# Altium PCB PCB1.PcbDoc
Units mm, origin at the board's own origin, x right, y up, seen from the top; angles counter-clockwise.
Board outline 48 x 27 mm, 4 copper layers (Top Layer, Internal Plane 1, Internal Plane 2, Bottom Layer); 23 components, 28 nets, 124 pads, 31 vias.
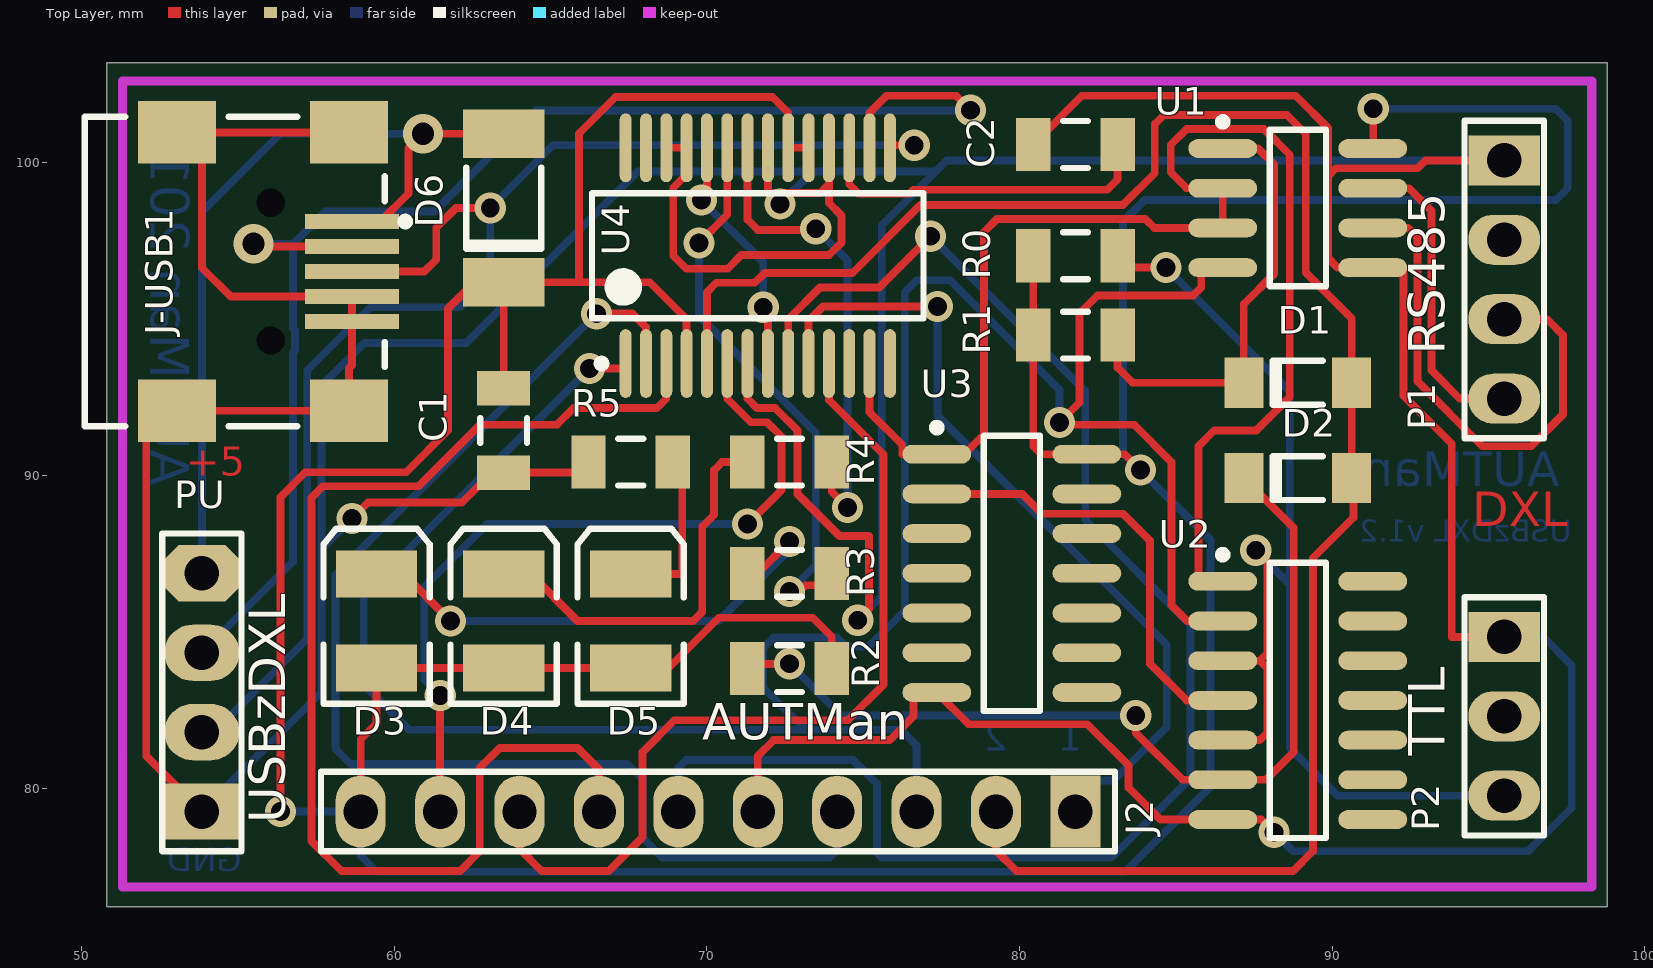
[diagram p0: Top Layer view]
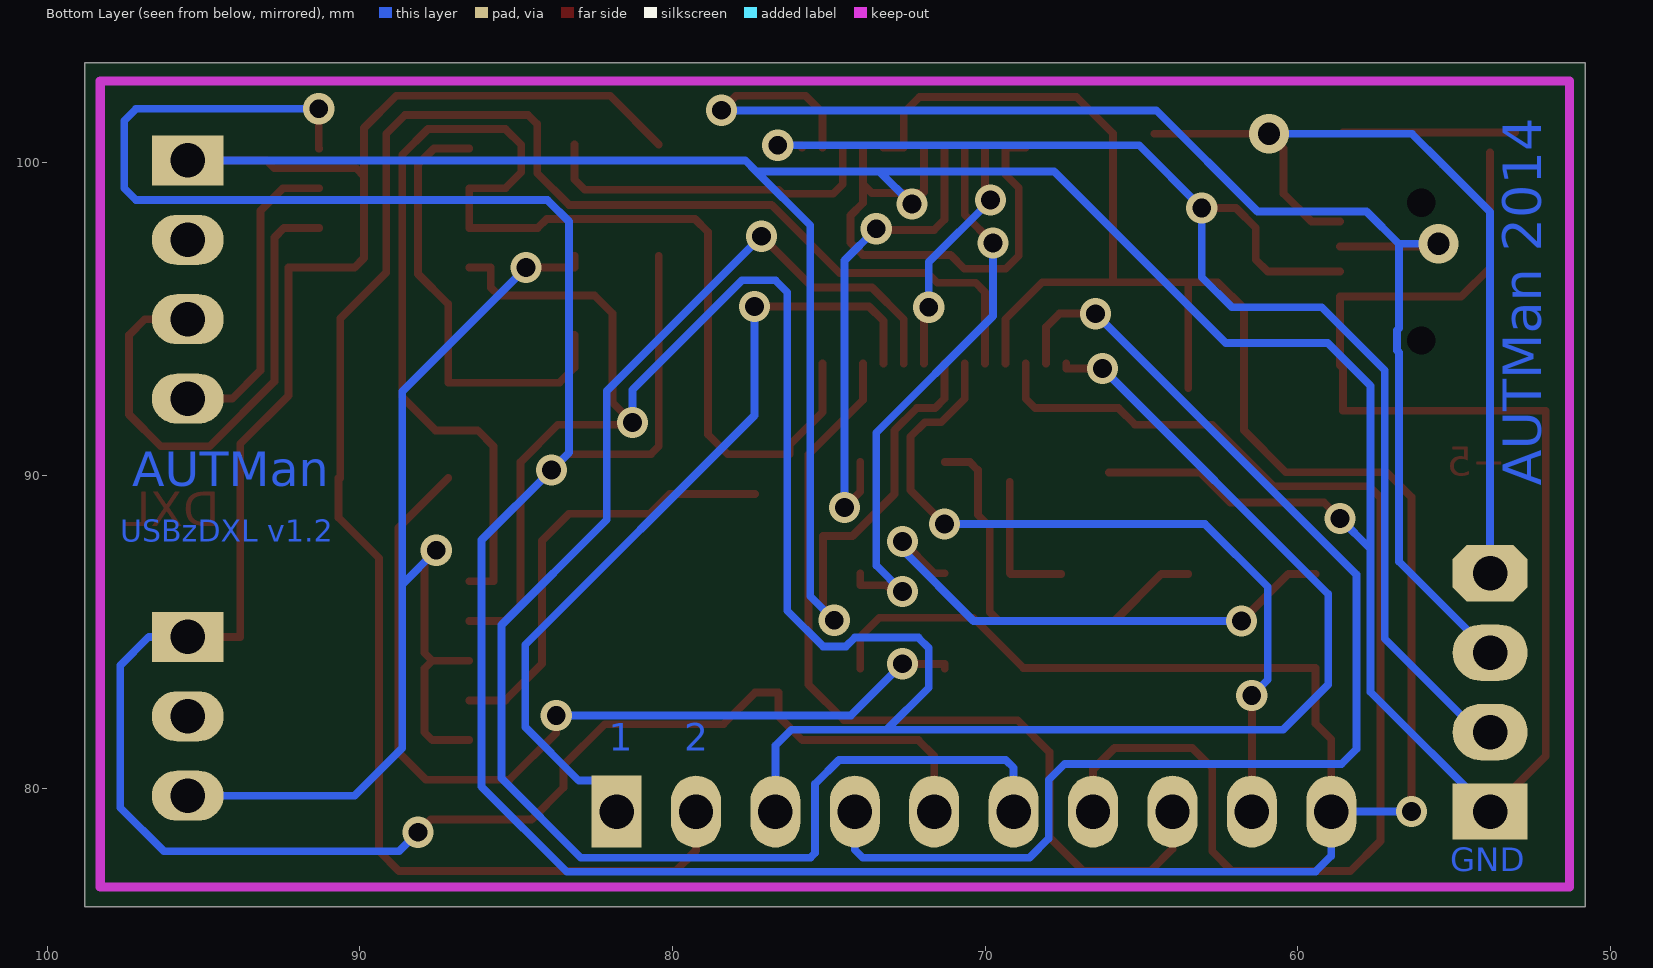
[diagram p1: Bottom Layer view, seen from below]
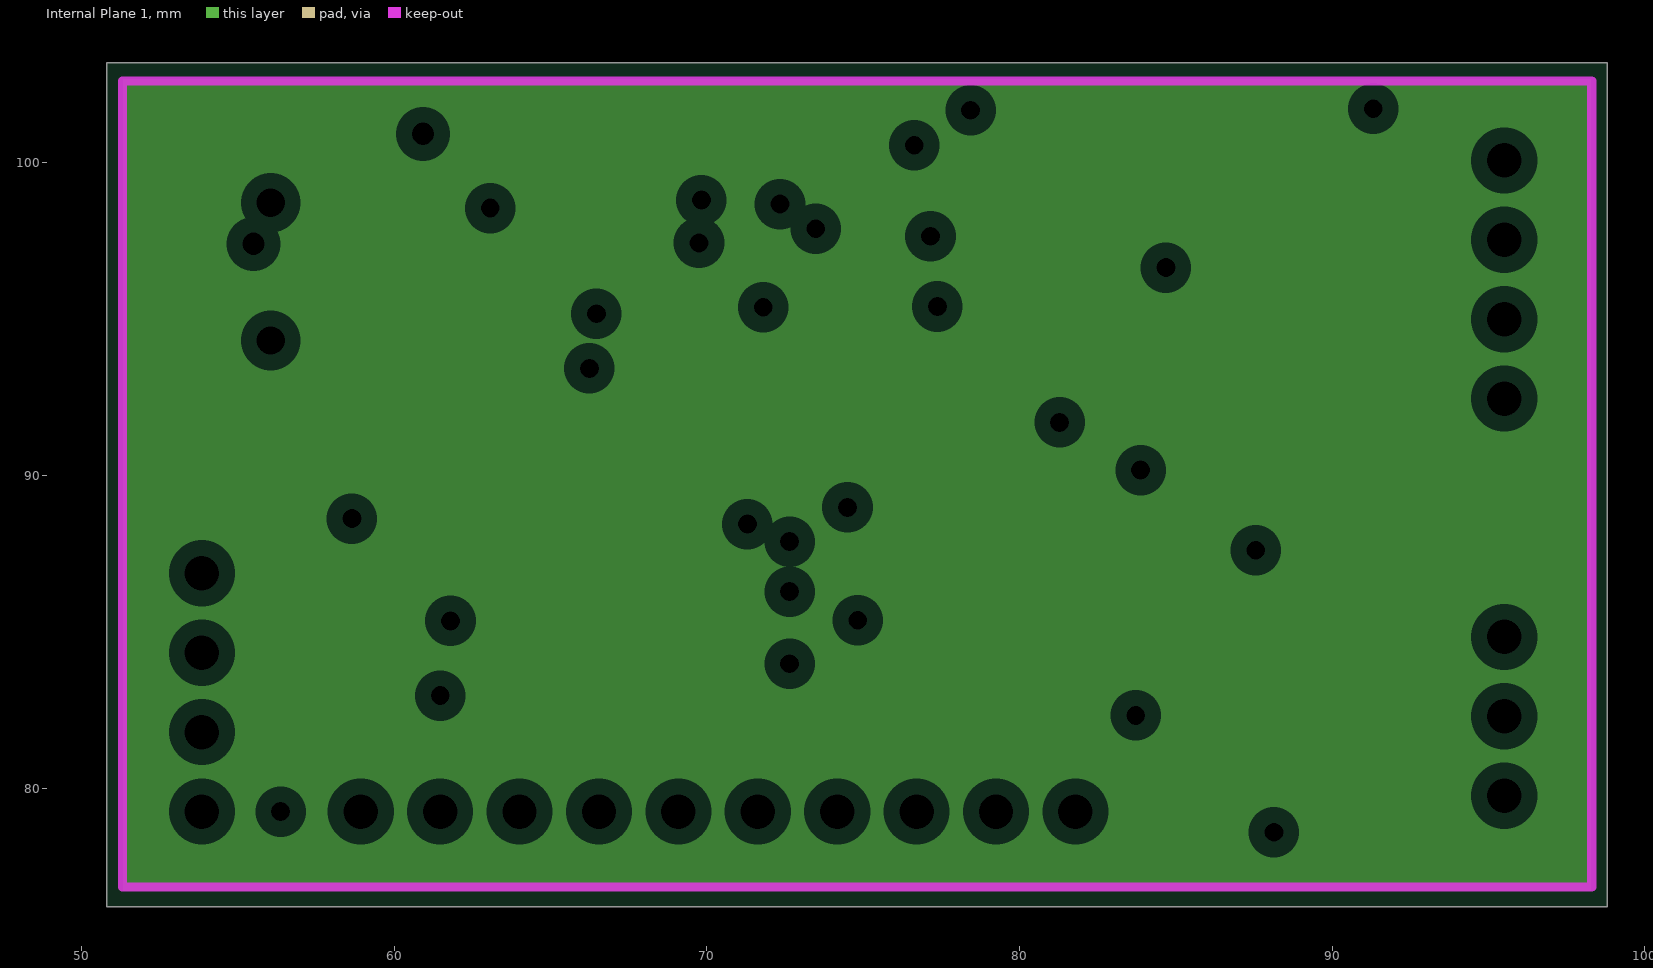
[diagram p2: Internal Plane 1, clearances drawn from the general rule]
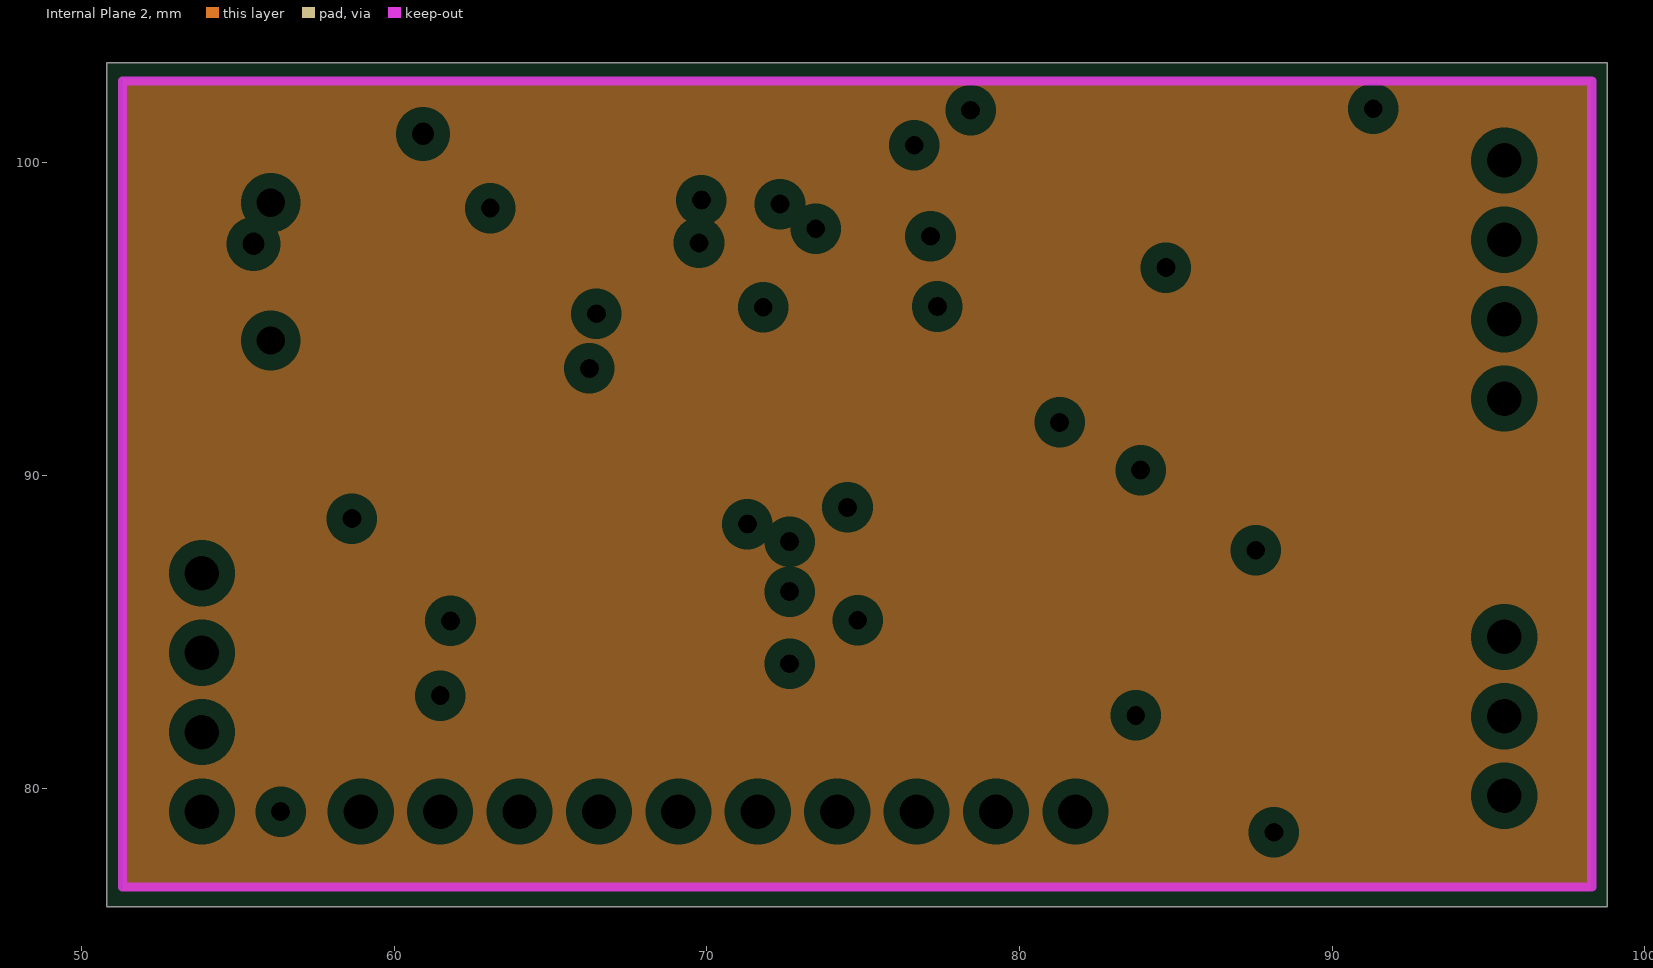
[diagram p3: Internal Plane 2, clearances drawn from the general rule]

## Layer stack, top to bottom
Top Layer: signal copper 0.0356
Dielectric: dielectric 0.32, FR-4, Dk 4.8
Internal Plane 1: plane copper 0.0356
Dielectric: dielectric 0.32, FR-4, Dk 4.8
Internal Plane 2: plane copper 0.0356
Dielectric: dielectric 0.32, FR-4, Dk 4.8
Bottom Layer: signal copper 0.0356

## Board outline
50.8,76.2 98.8,76.2 98.8,103.2 50.8,103.2

## Design rules (kind name [scope] priority, off if disabled: settings)
Clearance [All] p1: gap=0.2
PlaneClearance [All] p1: clearance=0.508
PlaneConnect [All] p1: planeconnectstyle=Relief reliefexpansion=0.508 reliefentries=4 reliefconductorwidth=0.254 reliefairgap=0.254
PolygonConnect [All] p1: connectstyle=Relief reliefconductorwidth=0.254 reliefentries=4 polygonreliefangle="90 Angle"
RoutingVias [All] p1: holewidth=0.6 width=1 viastyle="Through Hole" minholewidth=0.711 minwidth=1.27 maxholewidth=0.711 maxwidth=1.27
SilkscreenOverComponentPads [All] p1: minsilkscreentomaskgap=0.254
SolderMaskExpansion [All] p1: expansion=0.102
Width [All] p1: maxlimit=0.25 minlimit=0.25 preferedwidth=0.25
25 further rules are at their usual default settings.

## Components (designator, comment, footprint, x,y, rotation, side; value= is the part's Value field where it differs from the comment)
C1 "Cap Semi" CAPC3216L 63.5,91.44 r270 top
C2 "Cap Semi" CAPC3216L 81.788,100.584 r0 top
D1 "1n4148" DL-35 88.9,92.964 r180 top
D2 "1n4148" DL-35 88.9,89.916 r180 top
D3 "Red" DSO-C2/D5.6 59.436,85.344 r90 top
D4 "Red" DSO-C2/D5.6 63.5,85.344 r90 top
D5 "Red" DSO-C2/D5.6 67.564,85.344 r90 top
D6 "1N4007" MELF 63.5,98.552 r270 top
J2 "Header 10" HDR1X10 81.788,79.248 r180 top
J-USB1 "440247-1" 440247 50.8,96.52 r180 top
P1 "Dy_RX" HDR1X4#1 95.504,100.076 r270 top
P2 "Dy_AX" HDR1X3 95.504,84.836 r270 top
PU "Header 4" HDR1X4#2 53.848,79.248 r90 top
R0 "10K" RESC3216L 81.788,97.028 r180 top
R1 "10K" RESC3216L 81.788,94.488 r180 top
R2 "10K" RESC3216L 72.644,83.82 r0 top
R3 "Res Semi" RESC3216L 72.644,86.868 r0 top
R4 "Res Semi" RESC3216L 72.644,90.424 r0 top
R5 "Res Semi" RESC3216L 67.564,90.424 r180 top
U1 "MAX485CSA" NSO8_N 88.9,98.552 r0 top
U2 "M74HC126M1R" SO14_N 88.9,82.804 r0 top
U3 "MC74HC04AD" 751A-02_N 79.756,86.868 r0 top
U4 "IC_FT232RL" SSOP-28 71.628,97.028 r90 top

## Footprints (in the part's own frame and the unit in brackets; to place one, negate y for a bottom-side part, rotate by r counter-clockwise, add the part's x,y. Pads: shape width x height; smd on the part's side, far side on the other; paste and mask are expansions set on the pad)
751A-02_N [mm] "SOIC, 14-Leads, Body 8.7x3.9mm, Pitch 1.27mm, IPC Medium Density"
  oval 2.2x0.6 smd: 1(-2.4,3.81) 2(-2.4,2.54) 3(-2.4,1.27) 4(-2.4,0) 5(-2.4,-1.27) 6(-2.4,-2.54) 7(-2.4,-3.81) 8(2.4,-3.81) 9(2.4,-2.54) 10(2.4,-1.27) 11(2.4,0) 12(2.4,1.27) 13(2.4,2.54) 14(2.4,3.81)
  silkscreen extent -2.52,-4.4 0.9,4.78, body extent -1.95,-4.33 1.95,4.33, height 1.75
440247 [mm] "Connector; USB2.0, Type B, SM; 5 Position; Right Angle"
  rect 3x0.48 smd: 1(-7.85,-1.6) 2(-7.85,-0.8) 3(-7.85,0) 4(-7.85,0.8) 5(-7.85,1.6)
  rect 2.5x2 smd: 6(-7.75,4.45) 7(-2.25,4.45) 8(-7.75,-4.45) 9(-2.25,-4.45)
  round 0.6 hole 0.9 unplated: MH1(-5.25,2.2) MH2(-5.25,-2.2)
  silkscreen extent -9.68,-4.95 0.7,4.95
CAPC3216L [mm] "Chip Capacitor, Body 3.2x1.6mm, IPC High Density"
  rect 1.1x1.7 smd: 1(-1.35,0) 2(1.35,0)
  silkscreen extent -0.4,-0.75 0.4,0.75, body extent -1.7,-0.9 1.7,0.9, height 1.3
DL-35 [mm] "Metal Electrode Face (MELF) Diode; Body 3.5 x 1.5 mm (LxDia)"
  rect 1.25x1.6 smd: 1(-1.725,0) 2(1.725,0)
  silkscreen extent -0.8,-0.7 0.8,0.7
DSO-C2/D5.6 [mm] "SM LED; 2 C-Bend Leads; Body 3.5 x 2.8 x 1.9 mm, inc leads (LxWxH typ)"
  rect 1.5x2.6 smd: 1(-1.5,0) 2(1.5,0)
  silkscreen extent -2.65,-1.7 2.95,1.7
HDR1X3 [mm] "Connector; Header; 3 Position"
  rect 1.6x2.3 hole 1.1: 1(0,0)
  oval 1.6x2.3 hole 1.1: 2(2.54,0) 3(5.08,0)
  silkscreen extent -1.27,-1.27 6.35,1.27
HDR1X4#1 [mm] "Connector; Header; 4 Position"
  rect 1.6x2.3 hole 1.1: 1(0,0)
  oval 1.6x2.3 hole 1.1: 2(2.54,0) 3(5.08,0) 4(7.62,0)
  silkscreen extent -1.27,-1.27 8.89,1.27
HDR1X4#2 [mm] "Connector; Header; 4 Position"
  rect 1.8x2.4 hole 1.1: 1(0,0)
  oval 1.8x2.4 hole 1.1: 2(2.54,0) 3(5.08,0)
  oct 1.8x2.4 hole 1.1: 4(7.62,0)
  silkscreen extent -1.27,-1.27 8.89,1.27
HDR1X10 [mm] "Connector; Header; 10 Position"
  rect 1.6x2.3 hole 1.1: 1(0,0)
  oval 1.6x2.3 hole 1.1: 2(2.54,0) 3(5.08,0) 4(7.62,0) 5(10.16,0) 6(12.7,0) 7(15.24,0) 8(17.78,0) 9(20.32,0) 10(22.86,0)
  silkscreen extent -1.27,-1.27 24.13,1.27
MELF [mm] "Metal Electrode Face (MELF) Diode; Body 5 x 2.5 mm (LxDia)"
  rect 1.55x2.6 smd: 1(-2.375,0) 2(2.375,0)
  silkscreen extent -1.3,-1.2 1.3,1.2
NSO8_N [mm] "SOIC, 8-Leads, Body 4.9x3.9mm, Pitch 1.27mm, IPC Medium Density"
  oval 2.2x0.6 smd: 1(-2.4,1.905) 2(-2.4,0.635) 3(-2.4,-0.635) 4(-2.4,-1.905) 5(2.4,-1.905) 6(2.4,-0.635) 7(2.4,0.635) 8(2.4,1.905)
  silkscreen extent -2.52,-2.5 0.9,2.88, body extent -2,-2.5 2,2.5, height 1.75
RESC3216L [mm] "Chip Resistor, Body 3.1x1.6mm, IPC High Density"
  rect 1.1x1.7 smd: 1(-1.35,0) 2(1.35,0)
  silkscreen extent -0.4,-0.75 0.4,0.75, body extent -1.68,-0.87 1.68,0.87, height 2.54
SO14_N [mm] "SOIC, 14-Leads, Body 8.7x3.9mm, Pitch 1.27mm, IPC Medium Density"
  oval 2.2x0.6 smd: 1(-2.4,3.81) 2(-2.4,2.54) 3(-2.4,1.27) 4(-2.4,0) 5(-2.4,-1.27) 6(-2.4,-2.54) 7(-2.4,-3.81) 8(2.4,-3.81) 9(2.4,-2.54) 10(2.4,-1.27) 11(2.4,0) 12(2.4,1.27) 13(2.4,2.54) 14(2.4,3.81)
  silkscreen extent -2.52,-4.4 0.9,4.78, body extent -1.95,-4.33 1.95,4.33, height 1.75
SSOP-28 [mm] "28-Pin SSOP 0.65 mm Pitch"
  oval 2.2x0.38 smd: 1(-3.45,4.225) 2(-3.45,3.575) 3(-3.45,2.925) 4(-3.45,2.275) 5(-3.45,1.625) 6(-3.45,0.975) 7(-3.45,0.325) 8(-3.45,-0.325) 9(-3.45,-0.975) 10(-3.45,-1.625) 11(-3.45,-2.275) 12(-3.45,-2.925) 13(-3.45,-3.575) 14(-3.45,-4.225) 15(3.45,-4.225) 16(3.45,-3.575) 17(3.45,-2.925) 18(3.45,-2.275) 19(3.45,-1.625) 20(3.45,-0.975) 21(3.45,-0.325) 22(3.45,0.325) 23(3.45,0.975) 24(3.45,1.625) 25(3.45,2.275) 26(3.45,2.925) 27(3.45,3.575) 28(3.45,4.225)
  silkscreen extent -3.57,-5.3 2,5.3, body extent -2.7,-5.3 2.7,5.3, height 2

## Part data
C1 C2: "Capacitor (Semiconductor SIM Model)"
D1 D2: library part DL5233B, "Silicon Zener Diode"
D3 D4 D5: library part LED3, "Typical BLUE SiC LED"
D6: library part ZMU100, "High-Voltage Power Zener Diode"
J2: "Header, 10-Pin"
J-USB1: "USB 2.0, Right Angle, SMT, B Type, Receptacle, 5 Position, Black"
P1: library part "Header 4", "Header, 4-Pin"
P2: library part "Header 3", "Header, 3-Pin"
PU: "Header, 4-Pin"
R0 R1 R2: library part ERJ6RS, "Low Ohmic Value Thick Film Chip Resistor, 0.1 Ohm to 0.2 Ohm Range, 1%, 2% and 5% Tolerance, 0805 Size, 0.125 W"
R3 R4 R5: "Semiconductor Resistor"
U1: "Low-Power, Slew-Rate-Limited RS-485/RS-422 Transceiver"
U2: "Quad Bus Buffer (3-State)"
U3: "Hex Inverter"
U4: "FT232R USB UART"

## Via types
v1: diameter 1, hole 0.6, Top Layer to Bottom Layer, 29 vias
v2: diameter 1.27, hole 0.711, Top Layer to Bottom Layer, 2 vias

## Nets (pads, with @x,y where several pads share a name; then routed paths per layer and width w, separated by ;. In a path a pad name is that pad's centre, name@x,y a point inside that pad or via, vN(x,y) a via of type N, cw(c..) or ccw(c..) an arc to the next point about the centre after c; other vN are vias at no path point)
+5V: C1.1 D3.1 D4.1 D5.1 D6.2 J2.10 R0.2 R1.2 R2.2 U1.8 U3.14 U4.4 U4.19 U4.20 | length 154.8
  Top Layer w0.25: v1(56.363,79.248) 56.363,89.306 57.158,90.101 60.381,90.101 61.722,91.442 61.722,95.34 62.559,96.177 D6.2 ; J2.10 58.928,81.559 59.436,82.067 D3.1 D4.1 D5.1 68.783,83.844 70.384,85.445 73.385,85.445 73.994,84.836 R2.2 ; C1.1 D6.2 ; 65.913,96.177 65.913,100.94 67.081,102.108 72.095,102.108 72.603,101.6 U4.20 U4.19 ; U4.4 69.353,94.996 68.172,96.177 D6.2 ; R0.2 R1.2 80.438,90.932 80.692,90.678 U3.14 83.363,90.678 v1(83.871,90.17) ; U1.8 91.313,100.457 v1(91.313,101.727)
  Bottom Layer w0.25: v1(56.363,79.248) J2.10 58.928,77.831 59.436,77.323 83.383,77.323 86.106,80.046 86.106,87.935 v1(83.871,90.17) 83.312,90.729 83.312,98.12 83.998,98.806 97.155,98.806 97.536,99.187 97.536,101.346 97.155,101.727 v1(91.313,101.727)
+5V-USB: D6.1 J-USB1.1 PU.4 | length 28.2
  Top Layer w0.25: PU.4 PU.4@53.848,87.428 ; J-USB1.1 59.563,98.12 60.452,99.009 60.452,100.457 v2(60.922,100.927) D6.1 D6.1@64.592,100.927
  Bottom Layer w0.25: PU.4 53.848,98.425 55.372,99.949 56.35,100.927 v2(60.922,100.927)
CTS: J2.8 U4.11 | length 28.2
  Top Layer w0.25: J2.8 64.008,78.054 64.719,77.343 66.853,77.343 67.945,78.435 67.945,81.153 68.961,82.169 74.51,82.169 75.653,83.312 75.653,90.666 73.903,92.416 U4.11
DATA: P2.3 R0.1 U2.3 U2.5 | length 42.1
  Top Layer w0.25: R0.1 83.138,96.647 v1(84.684,96.647) ; U2.5 87.681,81.534 87.935,81.788 87.935,83.82 87.681,84.074 ; U2.3 87.681,84.074 ; v1(87.554,87.605) 87.935,87.224 87.935,84.328 87.681,84.074
  Bottom Layer w0.25: v1(84.684,96.647) 88.646,92.685 88.646,86.512 ; v1(87.554,87.605) 88.646,86.512 ; P2.3 90.17,79.756 88.646,81.28 ; 88.646,81.28 88.646,86.512 ; 88.646,81.28 88.646,86.512
DATAM: P1.4 U1.7 | length 10
  Top Layer w0.25: U1.7 92.456,99.187 93.178,98.465 93.178,93.359 94.082,92.456 P1.4
DATAP: P1.3 U1.6 | length 16.7
  Top Layer w0.25: U1.6 92.423,97.917 92.728,97.612 92.728,93.009 94.805,90.932 96.368,90.932 97.384,91.948 97.384,94.488 96.876,94.996 P1.3
DCD: J2.1 U4.10 | length 26.8
  Top Layer w0.25: U4.10 73.253,94.942 73.713,95.402 v1(77.376,95.402)
  Bottom Layer w0.25: v1(77.376,95.402) 77.376,91.915 84.709,84.582 84.709,81.954 82.994,80.239 81.788,80.239 J2.1
DEN: U1.2 U1.3 U2.1 U3.1 U4.13 | length 45.4
  Top Layer w0.25: U4.13 75.203,92.024 76.251,90.976 76.251,90.678 U3.1 78.232,90.678 78.867,91.313 78.867,97.79 79.28,98.203 84.023,98.203 84.309,97.917 U1.3 U1.2 85.344,99.187 84.836,99.695 84.836,100.574 85.344,101.082 87.818,101.082 88.646,100.254 88.646,92.507 87.579,91.44 86.233,91.44 85.725,90.932 85.725,86.614 U2.1
DEN#: U2.4 U3.2 | length 14.2
  Top Layer w0.25: U3.2 80.086,89.408 80.721,88.773 83.312,88.773 84.175,87.91 84.175,83.973 85.344,82.804 U2.4
DSR: J2.6 U4.9 | length 49.4
  Top Layer w0.25: U4.9 72.603,94.996 73.619,96.012 75.514,96.012 v1(77.153,97.65)
  Bottom Layer w0.25: J2.6 69.088,80.645 69.342,80.899 74.676,80.899 75.438,80.137 75.438,77.925 75.59,77.773 82.931,77.773 85.471,80.313 85.471,85.217 82.105,88.583 82.105,92.698 v1(77.153,97.65)
DTR: J2.4 U4.2 | length 40.2
  Top Layer w0.25: v1(66.469,95.174) 67.621,95.174 68.053,94.742 U4.2
  Bottom Layer w0.25: v1(66.469,95.174) 58.124,86.829 58.124,81.245 58.598,80.772 67.455,80.772 67.963,80.264 67.963,78.39 68.58,77.773 73.914,77.773 74.168,78.027 J2.4
FTRXD_DY: D1.1 D2.1 J2.2 U4.5 | length 61
  Top Layer w0.25: U4.5 70.003,95.86 70.302,96.159 71.531,96.159 71.841,96.469 74.651,96.469 76.835,98.654 83.312,98.654 84.328,99.67 84.328,101.235 84.625,101.532 88.553,101.532 89.154,100.931 89.154,96.492 90.625,95.021 D1.1 D2.1 ; J2.2 79.248,78.003 79.908,77.343 88.748,77.343 89.383,77.978 89.383,87.351 90.678,88.646 D2.1@90.678,89.916
FTTXD_DY: J2.3 U1.4 U2.2 U4.1 | length 81.1
  Top Layer w0.25: v1(66.243,93.421) 67.403,93.421 U4.1 ; v1(81.28,91.694) 81.915,92.329 81.915,95.174 82.499,95.758 85.558,95.758 85.812,96.012 85.812,96.647 U1.4 ; v1@81.356,91.618 83.668,91.618 84.861,90.424 84.861,85.852 85.369,85.344 U2.2
  Bottom Layer w0.25: v1(66.243,93.421) 59.025,86.203 59.025,83.312 60.472,81.864 73.152,81.864 ; J2.3 76.708,81.356 76.2,81.864 73.152,81.864 ; v1@81.356,91.618 v1(81.28,91.694) 81.28,92.735 77.775,96.241 76.708,96.241 76.327,95.86 76.327,85.674 75.184,84.531 74.447,84.531 74.168,84.811 72.136,84.811 71.806,84.48 71.806,83.21 73.152,81.864
GND: C1.2 C2.1 J2.5 J-USB1.4 J-USB1.5 J-USB1.6 J-USB1.7 J-USB1.8 J-USB1.9 P1.1 P2.1 PU.1 R5.2 U1.5 U2.7 U3.7 U4.7 U4.18 U4.21 U4.25 U4.26 | length 225
  Top Layer w0.25: J-USB1.9 J-USB1.8 ; PU.1 52.07,81.026 52.07,92.07 J-USB1.6 58.55,93.421 58.65,93.521 J-USB1.5 J-USB1.4 54.775,95.72 53.848,96.647 J-USB1.9@53.848,100.33 ; v1(58.649,88.621) 59.157,89.129 62.158,89.129 63.119,90.09 C1.2 R5.2@66.04,90.09 ; U4.26 U4.25 69.353,99.631 68.923,99.201 68.923,97.028 69.342,96.609 70.663,96.609 71.107,97.053 73.914,97.053 74.307,97.447 74.307,98.312 73.903,98.717 73.903,99.314 ; U4.7 71.303,92.456 71.606,92.153 72.185,92.153 72.898,91.44 72.898,89.408 74.244,88.062 75.184,88.062 75.184,85.725 v1(74.828,85.369) ; J2.5 71.628,81.026 72.136,81.534 75.844,81.534 76.606,82.296 76.606,83.058 U3.7 78.372,82.042 82.169,82.042 83.49,80.721 83.49,80.01 84.506,78.994 U2.7 87.732,78.994 v1(88.138,78.588) ; U4.21 71.953,99.065 71.984,99.035 ; v1(72.339,98.679) 71.984,99.035 ; U4.18 73.903,99.314 ; C2.1 81.995,102.141 88.834,102.141 89.865,101.11 89.865,99.568 ; P2.1 93.828,84.836 93.828,91.008 92.278,92.558 92.278,96.647 U1.5 90.17,96.647 89.865,96.952 89.865,99.568 ; P1.1 92.989,100.076 92.735,99.822 90.119,99.822 89.865,99.568 ; 71.984,99.035 73.624,99.035 73.903,99.314
  Bottom Layer w0.25: PU.1 57.669,83.069 57.669,87.641 ; v1(58.649,88.621) 57.669,87.641 ; v1(72.339,98.679) 73.382,99.722 ; v1(74.828,85.369) 75.593,86.134 75.593,97.997 77.318,99.722 ; v1(88.138,78.588) 88.748,77.978 96.266,77.978 97.663,79.375 97.663,83.922 96.749,84.836 P2.1 ; P1.1 77.672,100.076 77.318,99.722 ; 57.669,87.641 57.669,92.861 59.042,94.234 62.306,94.234 67.793,99.72 73.382,99.722 ; 73.382,99.722 77.318,99.722
LED-RX: R4.2 U4.22 | length 15.6
  Top Layer w0.25: U4.22 71.303,98.178 71.628,97.853 73.444,97.853 v1(73.482,97.892) ; R4.2 73.994,89.48 v1(74.498,88.976)
  Bottom Layer w0.25: v1(73.482,97.892) 74.498,96.876 v1(74.498,88.976)
LED-TR: R3.2 U4.23 | length 18.3
  Top Layer w0.25: v1(69.748,97.434) 70.653,98.339 U4.23 ; v1(72.644,86.284) 72.949,86.284 73.152,86.487 73.994,86.487 R3.2
  Bottom Layer w0.25: v1(69.748,97.434) 69.748,95.098 73.482,91.364 73.482,87.122 v1(72.644,86.284)
NC: U4.8 U4.24 | length 7.9
  Top Layer w0.25: v1(69.825,98.806) 70.003,98.984 U4.24 ; v1(71.806,95.377) 71.953,95.23 U4.8
  Bottom Layer w0.25: v1(69.825,98.806) 71.806,96.825 v1(71.806,95.377)
NetC2_2: C2.2 U4.17 | length 11.2
  Top Layer w0.25: U4.17 74.553,99.314 74.858,99.009 76.479,99.009 76.606,99.136 82.804,99.136 83.138,99.47 C2.2
NetD1_2: D1.2 R1.1 U1.1 | length 14.5
  Top Layer w0.25: R1.1 83.138,93.443 83.617,92.964 D1.2 87.175,95.479 88.138,96.442 88.138,99.949 87.63,100.457 U1.1
NetD2_2: D2.2 R2.1 U2.6 | length 29.3
  Top Layer w0.25: R2.1 71.294,83.972 v1(72.644,83.972) ; v1(83.718,82.321) 83.718,81.763 85.217,80.264 U2.6 87.884,80.264 88.773,81.153 88.773,88.318 D2.2
  Bottom Layer w0.25: v1(72.644,83.972) 74.295,82.321 v1(83.718,82.321)
NetD3_2: D3.2 R3.1 | length 16.8
  Top Layer w0.25: D3.2 60.3,86.844 v1(61.8,85.344) ; R3.1 71.628,86.868 v1(72.644,87.884)
  Bottom Layer w0.25: v1(61.8,85.344) 70.371,85.344 72.644,87.617 v1(72.644,87.884)
NetD4_2: D4.2 R4.1 | length 13
  Top Layer w0.25: D4.2 64.364,86.844 65.864,85.344 69.563,85.344 69.85,85.631 69.85,88.363 70.231,88.744 70.231,90.17 70.485,90.424 R4.1
NetD5_2: D5.2 R5.1 | length 4.6
  Top Layer w0.25: D5.2 69.191,86.844 69.215,86.868 R5.1@69.215,89.789
RI: J2.9 U4.6 | length 25.2
  Top Layer w0.25: J2.9 v1(61.468,82.956) ; U4.6 70.653,92.456 71.406,91.703 71.924,91.703 72.39,91.237 72.39,89.535 v1(71.298,88.443)
  Bottom Layer w0.25: v1(61.468,82.956) 60.96,83.464 60.96,86.435 62.968,88.443 v1(71.298,88.443)
RTS: J2.7 U4.3 | length 39.2
  Top Layer w0.25: J2.7 66.548,80.594 65.862,81.28 63.373,81.28 62.738,80.645 62.738,77.978 62.103,77.343 58.318,77.343 57.353,78.308 57.353,89.286 57.718,89.651 60.776,89.651 62.742,91.618 65.202,91.618 65.735,92.151 68.398,92.151 68.703,92.456 U4.3
USB2D+: J-USB1.3 PU.2 U4.15 | length 43.9
  Top Layer w0.25: J-USB1.3 60.96,96.52 61.341,96.901 61.341,97.917 61.976,98.552 62.992,98.552 v1@63.246,98.298 ; U4.15 75.853,100.559 v1(76.632,100.559)
  Bottom Layer w0.25: PU.2 54.229,81.788 57.219,84.778 57.219,93.363 59.233,95.377 62.103,95.377 63.068,96.342 v1(63.068,98.552) 65.075,100.559 v1(76.632,100.559)
USB2D-: J-USB1.2 PU.3 U4.16 | length 49
  Top Layer w0.25: v2@55.461,97.32 J-USB1.2 56.641,97.32 ; U4.16 75.203,101.6 75.744,102.141 77.97,102.141 v1(78.435,101.676)
  Bottom Layer w0.25: PU.3 56.758,87.238 56.758,93.932 56.825,93.999 56.825,94.641 56.758,94.708 56.758,97.398 57.802,98.442 61.29,98.442 64.524,101.676 v1(78.435,101.676) ; v2(55.499,97.409) 56.758,97.409
VCC: U2.14
pads on no net: J-USB1.MH1 J-USB1.MH2 P1.2 P2.2 U2.8 U2.9 U2.10 U2.11 U2.12 U2.13 U3.3 U3.4 U3.5 U3.6 U3.8 U3.9 U3.10 U3.11 U3.12 U3.13 U4.12 U4.14 U4.27 U4.28

## Polygon pours and split planes (outlines as drawn)
no net on Internal Plane 1 (split plane): 98.29,76.71 51.31,76.71 51.31,102.69 98.29,102.69
no net on Internal Plane 2 (split plane): 98.29,76.71 51.31,76.71 51.31,102.69 98.29,102.69

## Keep-outs
Keep-Out Layer:
  lines w0.3: 51.308,76.835 98.298,76.835 98.298,102.616 51.308,102.616 51.308,76.835

## Other copper
Top Layer:
  text "+5" at 53.34,89.662 h1.6
  text "DXL" at 94.488,88.011 h1.9
Bottom Layer:
  text "AUTMan 2014" at 51.816,89.662 h2.1 r270
  text "AUTMan" at 97.282,89.281 h1.9
  text "USBzDXL v1.2" at 97.663,87.884 h0.7
  text "2" at 79.629,80.899 h1.5
  text "1" at 82.042,80.899 h1.5
  text "GND" at 55.118,77.089 h1.3

## Silkscreen, mask and mechanical layers (free items; w line width, h text height)
Top Overlay:
  text "RS485" at 93.98,93.853 h2 r90
  text "AUTMan" at 69.85,81.153 h2
  text "TTL" at 93.98,81.026 h2 r90
  text "USBzDXL" at 56.896,78.867 h2 r90

## Dimensions
51.308,76.835 to 98.298,76.835 on Mechanical 2
51.308,76.835 to 51.308,102.616 on Mechanical 2

## Text inside footprints (layer, text, board x,y; h text height)
J-USB1: Mechanical 1 "PCB Edge" at 50.368,100.556 h0.25 r270